# Altium PCB microwaveBoardCoplanar.PcbDoc
Units mm, origin at the board's own origin, x right, y up, seen from the top; angles counter-clockwise.
Board outline 85 x 25 mm, 2 copper layers (Top Layer, Bottom Layer), stack 1.594 mm thick; 2 components, 3 nets, 20 pads, 87 vias.
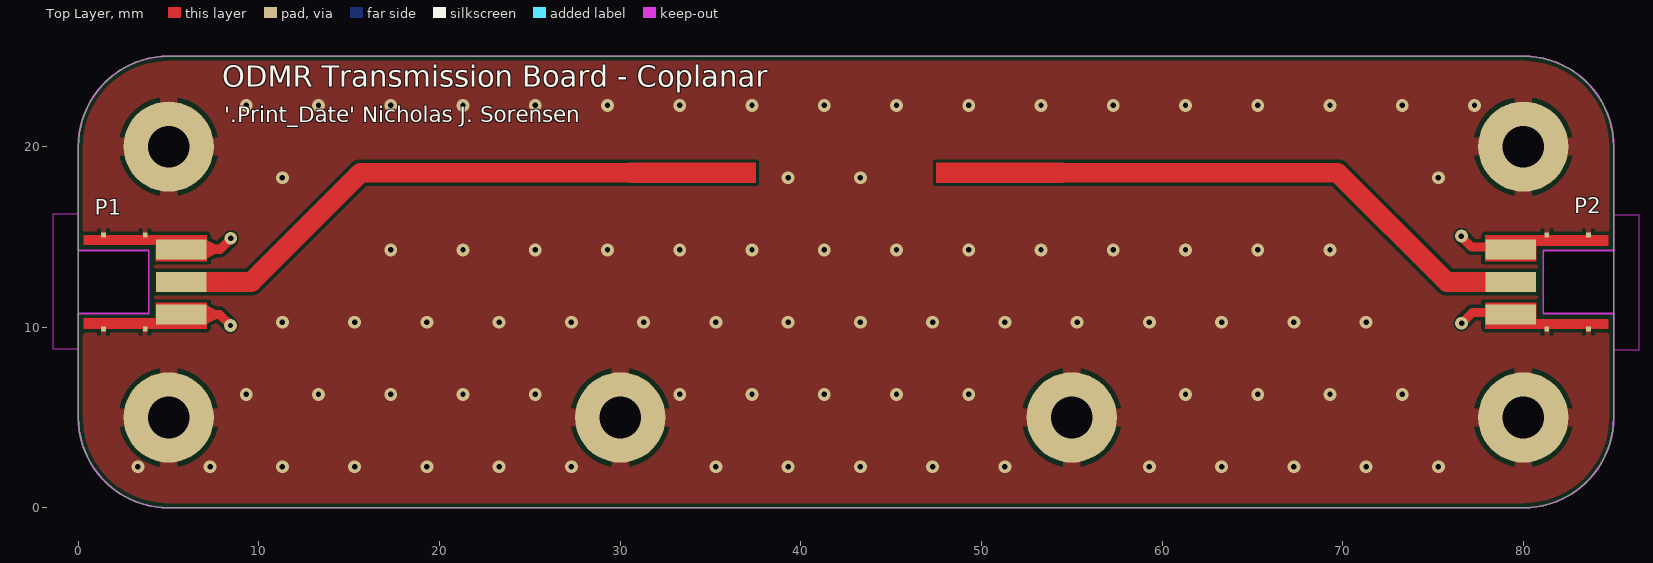
[diagram p0: Top Layer view]
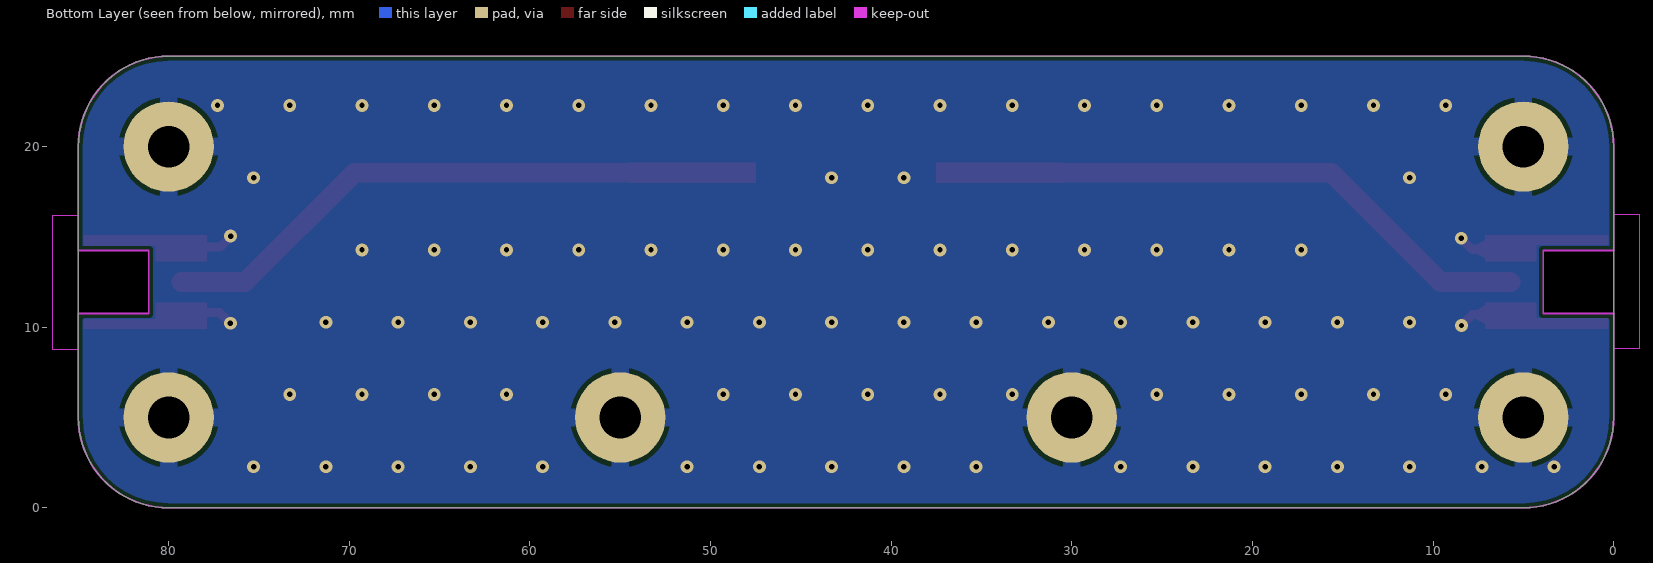
[diagram p1: Bottom Layer view, seen from below]

## Layer stack, top to bottom
Top Solder: solder mask 0.01, Solder Resist, Dk 4
Top Layer: signal copper 0.035
Dielectric 1: core 1.524, Core-043, Dk 4.3
Bottom Layer: signal copper 0.035
Bottom Solder: solder mask 0.01, Solder Resist, Dk 4

## Board outline
5,0 cw(c5,5) 0,5 0,20 cw(c5,20) 5,25 80,25 cw(c80,20) 85,20 85,5 cw(c80,5) 80,0

## Design rules (kind name [scope] priority, off if disabled: settings)
BoardOutlineClearance [All] p1: gap=0.2 ignorepadtopadclearanceinfootprint=FALSE
Clearance [All] p1: gap=0.2 ignorepadtopadclearanceinfootprint=FALSE
HoleSize [All] p1: absolutevalues=TRUE maxlimit=6.2 minlimit=0.2 maxpercent=80.000 minpercent=20.000
HoleToHoleClearance [All] p1: gap=0.4 allowstackedmicrovias=TRUE
MinimumAnnularRing [All] p1: minimumring=0.15
PolygonConnect PolygonConnect_1 [InNet('GND')] p1: thpad.connectstyle=Relief thpad.reliefconductorwidth=0.254 thpad.reliefentries=4 thpad.polygonreliefangle="90 Angle" thpad.airgapwidth=0.254 smdpad.connectstyle=Relief smdpad.reliefconductorwidth=0.254 smdpad.reliefentries=4 smdpad.polygonreliefangle="90 Angle" smdpad.airgapwidth=0.254 via.connectstyle=Direct via.reliefconductorwidth=0.254 via.reliefentries=4 via.polygonreliefangle="90 Angle" via.airgapwidth=0.254
PolygonConnect [All] p2: connectstyle=Relief reliefconductorwidth=0.254 reliefentries=4 polygonreliefangle="90 Angle" airgapwidth=0.254
RoutingVias [All] p1: holewidth=0.3 width=0.7 viastyle="Through Hole" minholewidth=0.3 minwidth=0.7 maxholewidth=1 maxwidth=2
SilkToSilkClearance [All] p1: silktosilkclearance=0
SilkToSolderMaskClearance [IsPad] p1: minsilkscreentomaskgap=0.2 clearancetoexposedcopper=TRUE
SolderMaskExpansion [All] p1: expansion=0.102 istentingtop=FALSE
Width 50OhmMatching [InNetClass('All Nets')] p1: maxlimit=1.106 minlimit=0.5 preferedwidth=1.1 impedanceprofiledriven=TRUE impedanceprofileid={A48A75CF-5E22-4AC7-8E88-BC86E92B5C01} impedanceprofilevalue=50.000000 minimp=50.000000 maximp=50.000000 favimp=50.000000
Width [All] p2: maxlimit=10 minlimit=0.1 preferedwidth=0.2 minimp=50.000000 maximp=50.000000 favimp=50.000000
26 further rules are at their usual default settings.

## Components (designator, comment, footprint, x,y, rotation, side; value= is the part's Value field where it differs from the comment)
P1 "MMCXV-J-P-HF-ST-EM1" MMCXV-J-P-HF-ST-EM1 0,12.5 r90 top
P2 "MMCXV-J-P-HF-ST-EM1" MMCXV-J-P-HF-ST-EM1 85,12.5 r270 top

## Footprints (in the part's own frame and the unit in brackets; to place one, negate y for a bottom-side part, rotate by r counter-clockwise, add the part's x,y. Pads: shape width x height; smd on the part's side, far side on the other; paste and mask are expansions set on the pad)
MMCXV-J-P-HF-ST-EM1 [mm]
  rect 1.1x2.8 smd: 1(0,-5.705)
  rect 0.254x0.254 smd: 2(-2.6,-1.395) 2(-2.6,-3.695) 2(2.6,-1.395) 2(2.6,-3.695)
  rect 1.1x2.8 smd paste-2 mask+0: 2(-1.8,-5.705) 2(1.8,-5.705)
  Top Layer region: 2.05,-4.295 1.15,-4.295 1.15,-7.105 2.6,-7.105 2.6,-0.305 2.05,-0.305
  Top Layer region: -2,-4.295 -1.15,-4.295 -1.15,-7.105 -2.6,-7.105 -2.6,-0.305 -2,-0.305
  Keep-Out Layer board cut-out: -3.7,0.005 -1.74,0.005 -1.74,-3.905 1.74,-3.905 1.74,0.005 3.75,0.005 3.75,1.405 -3.7,1.405
  Keep-Out Layer lines w0.1: -1.74,0.005 -1.74,-3.905 1.74,-3.905 1.74,0.005
  body extent -2.25,-6.71 2.25,0.69, height 2.11

## Part data
P1 P2: library part PXX-SAM-00013, "50 OHM MMCX HIGH-VIBRATION JACK,", Supplier Part Number 1=MMCXV-J-P-HF-ST-EM1-ND, Index=13, LatestRevisionDate=10/22/2021, LatestRevisionNote=..., Manufacturer Part Number=MMCXV-J-P-HF-ST-EM1, Part Number=PXX-SAM-00013, Published=10/22/2021, Publisher=AlbertaSat, Supplier 1=Digi-key, Supplier Link=#https://www.digikey.ca/en/products/detail/samtec-inc/MMCXV-J-P-HF-ST-EM1/10218387?s=N4IgTCBcDaILJwMIA0BqBaAUugCugEgGLoDKAKugKJwCMIAugL5A#

## Free pads (board coordinates)
  round 5 hole 2.3: ""(5,5) ""(5,20) ""(30,5) ""(55,5) ""(80,5) ""(80,20)

## Via types
v1: diameter 0.71, hole 0.3, Top Layer to Bottom Layer, tented both sides, 87 vias

## Nets (pads, with @x,y where several pads share a name; then routed paths per layer and width w, separated by ;. In a path a pad name is that pad's centre, name@x,y a point inside that pad or via, vN(x,y) a via of type N, cw(c..) or ccw(c..) an arc to the next point about the centre after c; other vN are vias at no path point)
GND: P1.2 P2.2 pad. | length 12
  Top Layer w0.5: P1.2@5.705,10.7 7.82,10.7 v1(8.427,10.093) ; P1.2@5.705,14.3 5.717,14.312 7.855,14.312 8.439,14.897 v1(8.439,14.919) ; v1(76.567,15.04) 76.567,15.018 77.151,14.433 79.289,14.433 P2.2@79.301,14.421 ; v1(76.579,10.214) 77.186,10.821 P2.2@79.301,10.821
  other v1: 3.296,2.276 7.296,2.276 11.296,2.276 15.296,2.276 19.296,2.276 23.296,2.276 27.296,2.276 35.296,2.276 39.296,2.276 43.296,2.276 47.296,2.276 51.296,2.276 59.296,2.276 63.296,2.276 67.296,2.276 71.296,2.276 75.296,2.276 9.296,6.276 13.296,6.276 17.296,6.276 21.296,6.276 25.296,6.276 33.296,6.276 37.296,6.276 41.296,6.276 45.296,6.276 49.296,6.276 61.296,6.276 65.296,6.276 69.296,6.276 73.296,6.276 11.296,10.276 15.296,10.276 19.296,10.276 23.296,10.276 27.296,10.276 31.296,10.276 35.296,10.276 39.296,10.276 43.296,10.276 47.296,10.276 51.296,10.276 55.296,10.276 59.296,10.276 63.296,10.276 67.296,10.276 71.296,10.276 17.296,14.276 21.296,14.276 25.296,14.276 29.296,14.276 33.296,14.276 37.296,14.276 41.296,14.276 45.296,14.276 49.296,14.276 53.296,14.276 57.296,14.276 61.296,14.276 65.296,14.276 69.296,14.276 11.296,18.276 39.296,18.276 43.296,18.276 75.296,18.276 9.296,22.276 13.296,22.276 17.296,22.276 21.296,22.276 25.296,22.276 29.296,22.276 33.296,22.276 37.296,22.276 41.296,22.276 45.296,22.276 49.296,22.276 53.296,22.276 57.296,22.276 61.296,22.276 65.296,22.276 69.296,22.276 73.296,22.276 77.296,22.276
NetP1_1: P1.1 | length 27.3
  Top Layer w1.1: P1.1 9.579,12.5 15.629,18.55 30.5,18.55
NetP2_1: P2.1 | length 27.3
  Top Layer w1.1: 54.498,18.55 69.715,18.55 75.765,12.5 P2.1

## Polygon pours and split planes (outlines as drawn)
GND on Bottom Layer "GND_L02_P000" (solid, pour order 0): -1.524,26.543 -1.016,26.035 85.598,26.035 85.598,-2.54 84.582,-1.524 -2.54,-1.524
GND on Top Layer "GND_L01_P001" (solid, pour order 1): -2.794,28.575 -1.524,27.305 88.519,27.305 88.519,-1.905 88.646,-2.032 -2.286,-2.032

## Keep-outs
Keep-Out Layer:
  lines w0.1: -0.005,10.76 0,5 ; 85,5 85.005,10.76
  lines w0.102: 0,5 ccw(c5,5) 5,0 80,0 ccw(c80,5) 85,5 ; 0,14.24 0,20 ; 85,14.24 85,20 ccw(c80,20) 80,25 5,25 ; 0,20 cw(c5,20) 5,25 ; 0,20 cw(c5,20) 5,25

## Other copper
Top Layer:
  region net NetP2_1: 50.498,19.1 50.498,18 51.498,18 51.498,19.1
  region net NetP2_1: 50.498,18 50.498,19.1 47.498,19.1 47.498,18
  region net NetP2_1: 51.498,19.1 51.498,18 54.498,18 54.498,19.1
  region net NetP1_1: 33.5,18 33.5,19.1 30.5,19.1 30.5,18
  region net NetP1_1: 34.5,19.1 34.5,18 37.5,18 37.5,19.1
  region net NetP1_1: 34.5,18 34.5,19.1 33.5,19.1 33.5,18

## Silkscreen, mask and mechanical layers (free items; w line width, h text height)
Top Overlay:
  text "ODMR Transmission Board - Coplanar" at 7.964,22.916 h2
  text "'.Print_Date' Nicholas J. Sorensen" at 8.091,21.036 h1.5
Mechanical 1:
  lines w0.254: 85,20 ccw(c80,20) 80,25 5,25 ccw(c5,20) 0,20 0,5 ccw(c5,5) 5,0 80,0 ccw(c80,5) 85,5 85,20.587